# Allegro board PCB_ASSIGN2.brd
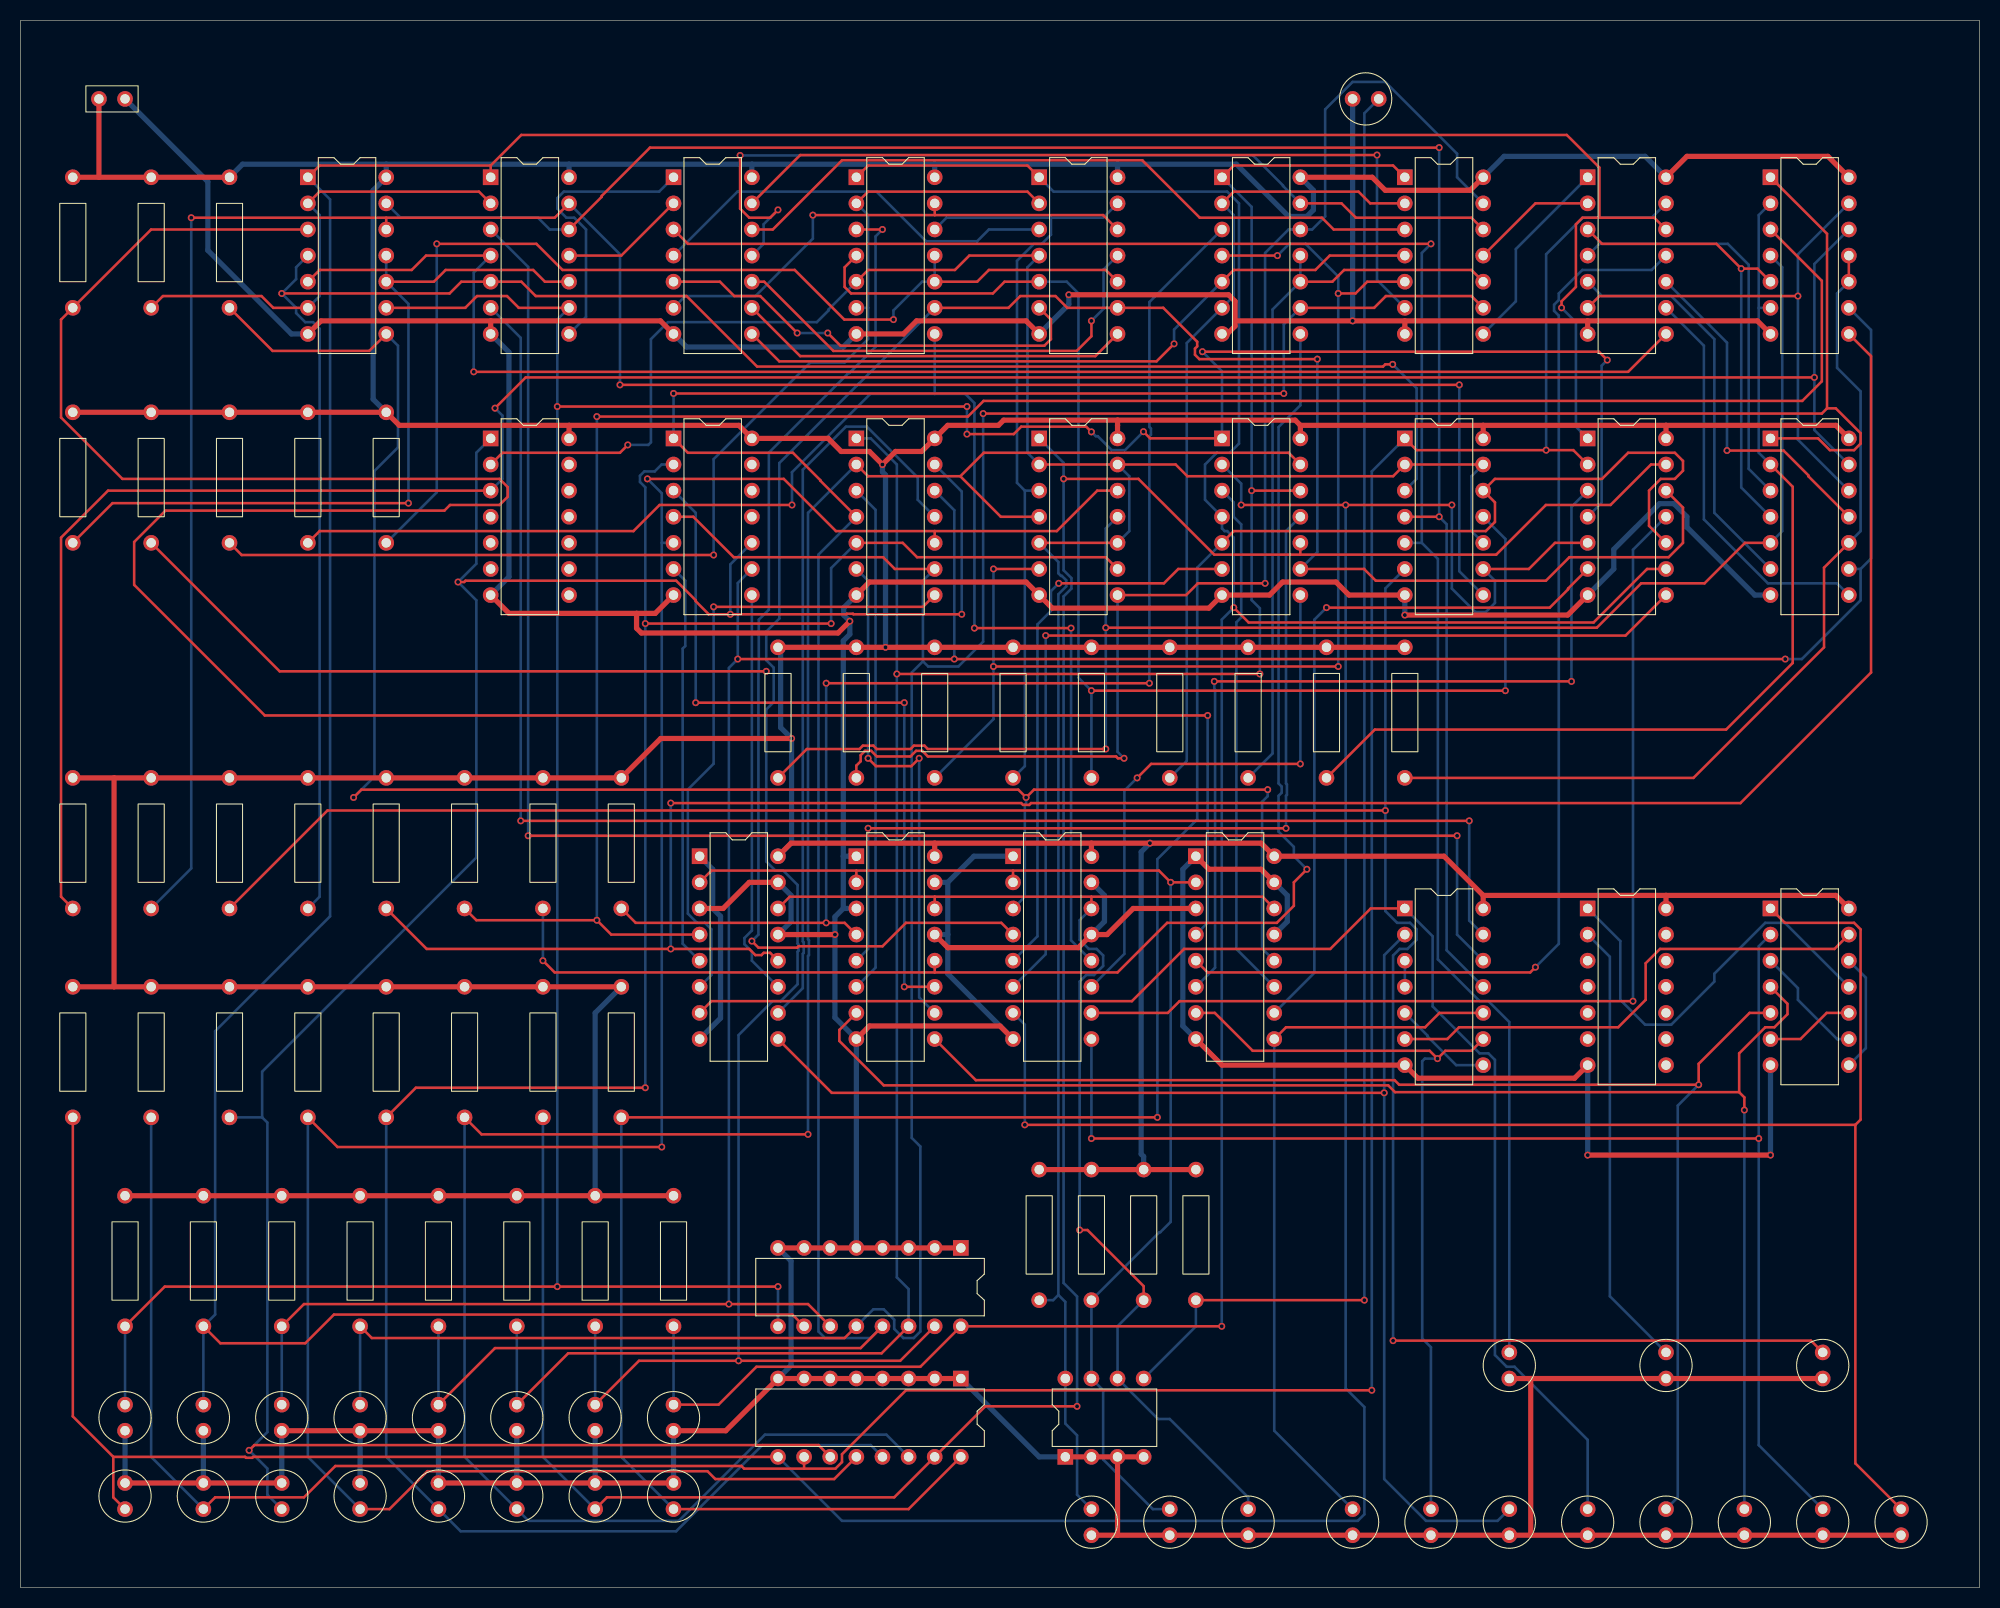
[diagram p0: board, top side]
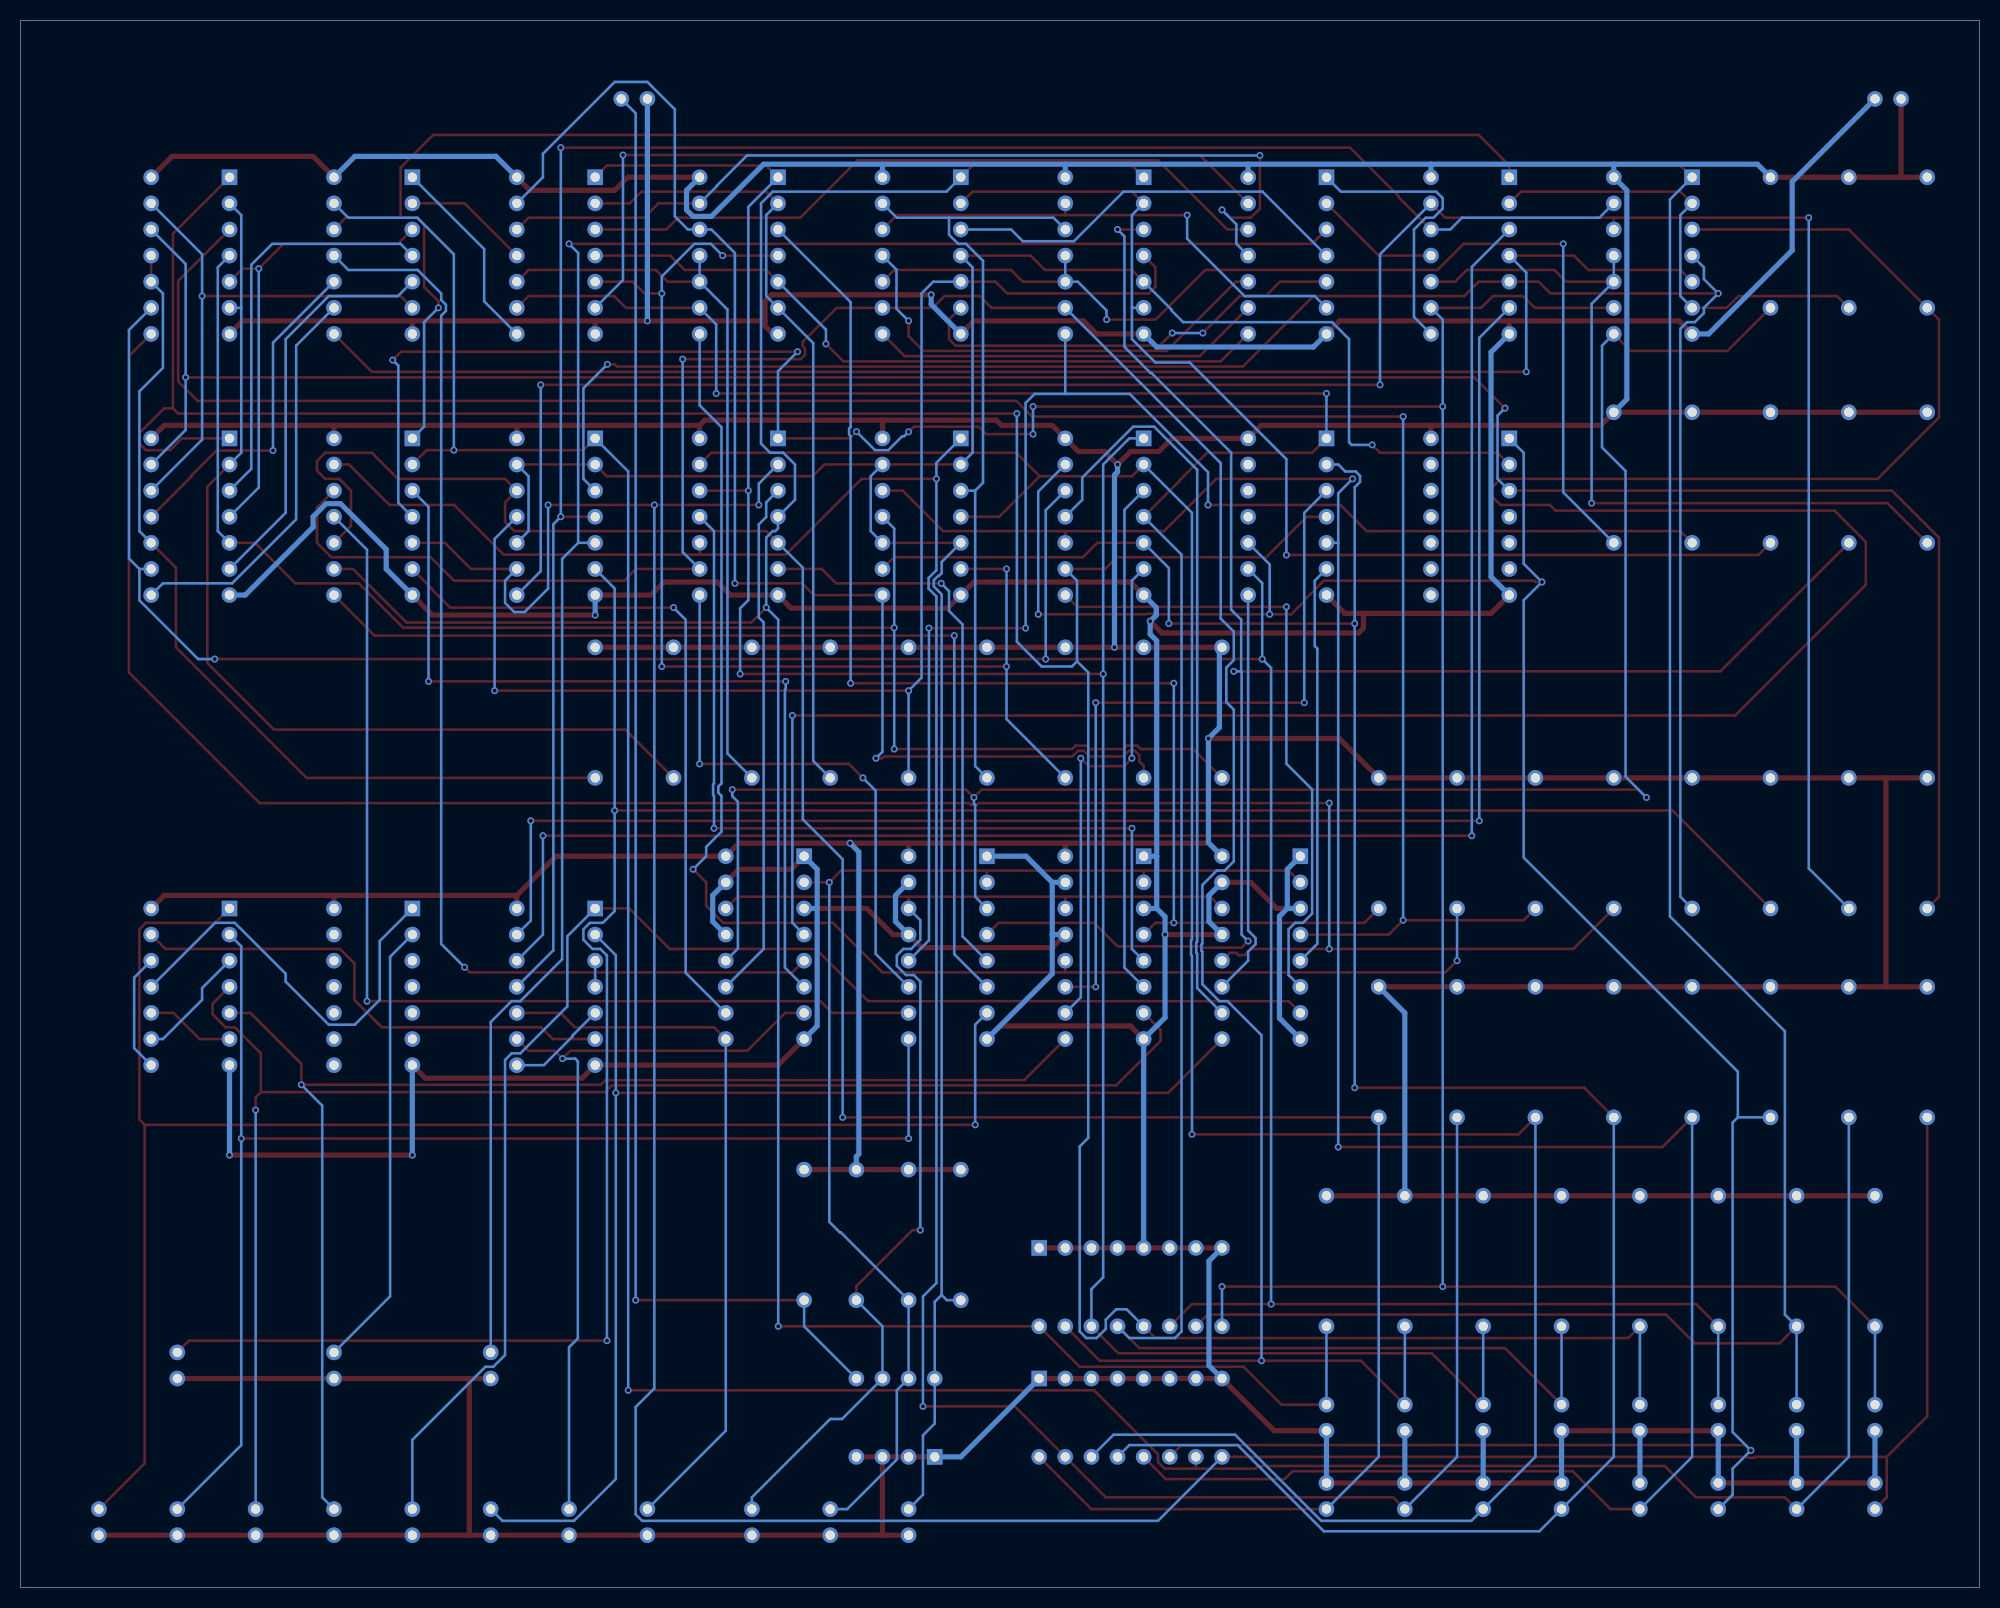
[diagram p1: board, bottom side, seen from below]

Outline 190.5 x 152.4 mm; copper layers: TOP, BOTTOM. Coordinates in mm from the lower left corner of the outline.
Outline path: 0,152.4 0,0 190.5,0 190.5,152.4 0,152.4

## Design rules (mm)
constraint set DEFAULT: min track width 0.254, pair gap 0.254
nets with their own width: min track width 0.508; nets GND VCC

## Placement (name value [footprint] x y rotation side)
D1  LED  [CAP196]  63.5 15.24 0 top
D2  LED  [CAP196]  55.88 15.24 0 top
D3  LED  [CAP196]  48.26 15.24 0 top
D4  LED  [CAP196]  40.64 15.24 0 top
D5  LED  [CAP196]  33.02 15.24 0 top
D6  LED  [CAP196]  25.4 15.24 0 top
D7  LED  [CAP196]  17.78 15.24 0 top
D8  LED  [CAP196]  10.16 15.24 0 top
D9  LED  [CAP196]  63.5 10.16 180 top
D10  LED  [CAP196]  55.88 10.16 180 top
D11  LED  [CAP196]  48.26 10.16 180 top
D12  LED  [CAP196]  40.64 10.16 180 top
D13  LED  [CAP196]  33.02 10.16 180 top
D14  LED  [CAP196]  25.4 10.16 180 top
D15  LED  [CAP196]  17.78 10.16 180 top
D16  LED  [CAP196]  10.16 10.16 180 top
D17  LED  [CAP196]  104.14 5.08 0 top
D18  LED  [CAP196]  111.76 5.08 0 top
D19  LED  [CAP196]  119.38 5.08 0 top
D20  LED  [CAP196]  182.88 5.08 0 top
D21  LED  [CAP196]  175.26 5.08 0 top
D22  LED  [CAP196]  167.64 5.08 0 top
D23  LED  [CAP196]  160.02 5.08 0 top
D24  LED  [CAP196]  152.4 5.08 0 top
D25  LED  [CAP196]  144.78 5.08 0 top
D26  LED  [CAP196]  137.16 5.08 0 top
D27  LED  [CAP196]  129.54 5.08 0 top
D28  LED  [CAP196]  129.54 144.78 270 top
D29  LED  [CAP196]  144.78 20.32 0 top
D30  LED  [CAP196]  160.02 20.32 0 top
D31  LED  [CAP196]  175.26 20.32 0 top
J1  HEADER 2  [JUMPER2]  7.62 144.78 0 top
R1  150  [RES500]  99.06 40.64 0 top
R2  150  [RES500]  104.14 40.64 0 top
R3  150  [RES500]  109.22 40.64 0 top
R4  150  [RES500]  114.3 40.64 0 top
R5  150  [RES500]  63.5 38.1 0 top
R6  150  [RES500]  55.88 38.1 0 top
R7  150  [RES500]  48.26 38.1 0 top
R8  150  [RES500]  40.64 38.1 0 top
R9  150  [RES500]  58.42 58.42 0 top
R10  150  [RES500]  33.02 38.1 0 top
R11  150  [RES500]  25.4 38.1 0 top
R12  150  [RES500]  50.8 58.42 0 top
R13  150  [RES500]  17.78 38.1 0 top
R14  150  [RES500]  43.18 58.42 0 top
R15  150  [RES500]  35.56 58.42 0 top
R16  150  [RES500]  10.16 38.1 0 top
R17  150  [RES500]  27.94 58.42 0 top
R18  150  [RES500]  20.32 58.42 0 top
R19  150  [RES500]  12.7 58.42 0 top
R20  150  [RES500]  5.08 58.42 0 top
R21  150  [RES500]  5.08 137.16 0 top
R22  150  [RES500]  12.7 137.16 0 top
R23  150  [RES500]  20.32 137.16 0 top
R24  150  [RES500]  5.08 114.3 0 top
R25  150  [RES500]  12.7 114.3 0 top
R26  150  [RES500]  20.32 114.3 0 top
R27  150  [RES500]  27.94 114.3 0 top
R28  150  [RES500]  35.56 114.3 0 top
R29  150  [RES500]  58.42 78.74 0 top
R30  150  [RES500]  111.76 91.44 0 top
R31  150  [RES500]  50.8 78.74 0 top
R32  150  [RES500]  119.38 91.44 0 top
R33  150  [RES500]  43.18 78.74 0 top
R34  150  [RES500]  127 91.44 0 top
R35  150  [RES500]  35.56 78.74 0 top
R36  150  [RES500]  134.62 91.44 0 top
R37  1K  [RES500]  27.94 78.74 0 top
R38  1K  [RES500]  20.32 78.74 0 top
R39  1K  [RES500]  12.7 78.74 0 top
R40  150  [RES500]  104.14 91.44 0 top
R41  150  [RES500]  96.52 91.44 0 top
R42  150  [RES500]  88.9 91.44 0 top
R43  150  [RES500]  81.28 91.44 0 top
R44  150  [RES500]  73.66 91.44 0 top
R45  150  [RES500]  5.08 78.74 0 top
SW1  SW DIP-4  [DIP8_3]  101.6 12.7 90 top
SW2  SW DIP-8  [DIP16_3]  91.44 33.02 270 top
SW3  SW DIP-8  [DIP16_3]  91.44 20.32 270 top
U1  7432  [DIP14_3]  170.18 66.04 0 top
U2  7404  [DIP14_3]  152.4 66.04 0 top
U3  7432  [DIP14_3]  134.62 66.04 0 top
U4  7486  [DIP14_3]  27.94 137.16 0 top
U5  7408  [DIP14_3]  45.72 137.16 0 top
U6  7432  [DIP14_3]  63.5 137.16 0 top
U7  7486  [DIP14_3]  81.28 137.16 0 top
U8  7408  [DIP14_3]  99.06 137.16 0 top
U9  7486  [DIP14_3]  116.84 137.16 0 top
U10  7408  [DIP14_3]  134.62 137.16 0 top
U11  7432  [DIP14_3]  152.4 137.16 0 top
U12  7486  [DIP14_3]  170.18 137.16 0 top
U13  7408  [DIP14_3]  170.18 111.76 0 top
U14  7408  [DIP14_3]  152.4 111.76 0 top
U15  74153  [DIP16_3]  114.3 71.12 0 top
U16  7486  [DIP14_3]  134.62 111.76 0 top
U17  7432  [DIP14_3]  116.84 111.76 0 top
U18  74153  [DIP16_3]  96.52 71.12 0 top
U19  7486  [DIP14_3]  99.06 111.76 0 top
U20  7408  [DIP14_3]  81.28 111.76 0 top
U21  74153  [DIP16_3]  81.28 71.12 0 top
U22  7432  [DIP14_3]  63.5 111.76 0 top
U23  74153  [DIP16_3]  66.04 71.12 0 top
U24  7486  [DIP14_3]  45.72 111.76 0 top

## Library data of the parts
D1-D31 = LED: Tolerance: ***; User Part Number: ***
J1 = HEADER 2: User Part Number: ***
R1-R36 R40-R45 = PULLUP_150: Tolerance: ***; User Part Number: ***
R37-R39 = PULLUP_1k: Tolerance: ***; User Part Number: ***
SW1 = SW DIP-4: Tolerance: ***; User Part Number: ***
SW2 SW3 = SW DIP-8: Tolerance: ***; User Part Number: ***
U1 U3 U6 U11 U17 U22 = 7432: Tolerance: ***; User Part Number: ***
U2 = 7404: Tolerance: ***; User Part Number: ***
U4 U7 U9 U12 U16 U19 U24 = 7486: Tolerance: ***; User Part Number: ***
U5 U8 U10 U13 U14 U20 = 7408: Tolerance: ***; User Part Number: ***
U15 U18 U21 U23 = 74153: Tolerance: ***; User Part Number: ***

## Footprints (pads in the part's own frame, mm; a bottom-side part is the same pattern mirrored in y, then rotated)
CAP196
  round 1.524 hole 0.914: 1(0,0) 2(0,2.54)
DIP8_3
  rect 1.524x1.524 hole 0.914: 1(0,0)
  round 1.524 hole 0.914: 2(0,-2.54) 3(0,-5.08) 4(0,-7.62) 5(7.62,-7.62) 6(7.62,-5.08) 7(7.62,-2.54) 8(7.62,0)
DIP14_3
  rect 1.524x1.524 hole 0.914: 1(0,0)
  round 1.524 hole 0.914: 2(0,-2.54) 3(0,-5.08) 4(0,-7.62) 5(0,-10.16) 6(0,-12.7) 7(0,-15.24) 8(7.62,-15.24) 9(7.62,-12.7) 10(7.62,-10.16) 11(7.62,-7.62) 12(7.62,-5.08) 13(7.62,-2.54) 14(7.62,0)
DIP16_3
  rect 1.524x1.524 hole 0.914: 1(0,0)
  round 1.524 hole 0.914: 2(0,-2.54) 3(0,-5.08) 4(0,-7.62) 5(0,-10.16) 6(0,-12.7) 7(0,-15.24) 8(0,-17.78) 9(7.62,-17.78) 10(7.62,-15.24) 11(7.62,-12.7) 12(7.62,-10.16) 13(7.62,-7.62) 14(7.62,-5.08) 15(7.62,-2.54) 16(7.62,0)
JUMPER2
  round 1.524 hole 0.914: 1(0,0) 2(2.54,0)
RES500
  round 1.524 hole 0.914: 1(0,-12.7) 2(0,0)

## Nets
GND: D1.1(CATHODE) D2.1(CATHODE) D3.1(CATHODE) D4.1(CATHODE) D5.1(CATHODE) D6.1(CATHODE) D7.1(CATHODE) D8.1(CATHODE) D9.1(CATHODE) D10.1(CATHODE) D11.1(CATHODE) D12.1(CATHODE) D13.1(CATHODE) D14.1(CATHODE) D15.1(CATHODE) D16.1(CATHODE) D17.1(CATHODE) D18.1(CATHODE) D19.1(CATHODE) D20.1(CATHODE) D21.1(CATHODE) D22.1(CATHODE) D23.1(CATHODE) D24.1(CATHODE) D25.1(CATHODE) D26.1(CATHODE) D27.1(CATHODE) D28.1(CATHODE) D29.1(CATHODE) D30.1(CATHODE) D31.1(CATHODE) J1.2 SW1.1 SW1.2 SW1.3 SW1.4 SW2.1 SW2.2 SW2.3 SW2.4 SW2.5 SW2.6 SW2.7 SW2.8 SW3.1 SW3.2 SW3.3 SW3.4 SW3.5 SW3.6 SW3.7 SW3.8 U1.7 U2.7 U3.7 U4.7 U5.7 U6.7 U7.7 U8.7 U9.7 U10.7 U11.7 U12.7 U13.7 U14.7 U15.1 U15.3 U15.8 U15.13 U15.15 U16.7 U17.7 U18.1 U18.8 U18.13 U18.15 U19.7 U20.7 U21.1 U21.3 U21.8 U21.13 U21.15 U22.7 U23.1 U23.3 U23.8 U23.13 U23.15 U24.7
VCC: J1.1 R1.2 R2.2 R3.2 R4.2 R5.2 R6.2 R7.2 R8.2 R9.2 R10.2 R11.2 R12.2 R13.2 R14.2 R15.2 R16.2 R17.2 R18.2 R19.2 R20.2 R21.2 R22.2 R23.2 R24.2 R25.2 R26.2 R27.2 R28.2 R29.2 R30.2 R31.2 R32.2 R33.2 R34.2 R35.2 R36.2 R37.2 R38.2 R39.2 R40.2 R41.2 R42.2 R43.2 R44.2 R45.2 U1.14 U2.14 U3.14 U4.14 U5.14 U6.14 U7.14 U8.14 U9.14 U10.14 U11.14 U12.14 U13.14 U14.14 U15.16 U16.14 U17.14 U18.16 U19.14 U20.14 U21.16 U22.14 U23.16 U24.14
A0: D1.2 R5.1 SW2.16 U7.1 U8.1 U14.9 U17.4
A1: D2.2 R6.1 SW2.15 U7.9 U8.9 U14.12 U17.9
A2: D3.2 R7.1 SW2.14 U9.1 U10.1 U17.12 U20.1
A3: D4.2 R8.1 SW2.13 U9.9 U10.9 U20.4 U22.1
A4: D5.2 R10.1 SW2.12 U12.1 U13.1 U20.9 U22.4
A5: D6.2 R11.1 SW2.11 U12.9 U13.9 U20.12 U22.9
A6: D7.2 R13.1 SW2.10 U4.1 U5.1 U11.12 U14.1
A7: D8.2 R16.1 SW2.9(B8) U4.9 U5.9 U14.4 U17.1
B0: D9.2 R9.1 SW3.16 U14.10 U16.12 U17.5
B1: D10.2 R12.1 SW3.15 U14.13 U17.10 U19.1
B2: D11.2 R14.1 SW3.14 U17.13 U19.4 U20.2
B3: D12.2 R15.1 SW3.13 U19.9 U20.5 U22.2
B4: D13.2 R17.1 SW3.12 U19.12 U20.10 U22.5
B5: D14.2 R18.1 SW3.11 U20.13 U22.10 U24.1
B6: D15.2 R19.1 SW3.10 U11.13 U14.2 U16.1
B7: D16.2 R20.1 SW3.9(B8) U14.5 U16.9 U17.2
CARRY: D29.2 U6.3 U16.5
CINTERNAL_BIBIT0: U6.6 U7.13 U8.12
CINTERNAL_BIBIT1: U6.11(Y) U9.13 U10.12
CINTERNAL_BIBIT2: U11.6 U12.13 U13.12
CINTERNAL_MSBIBIT: U3.11(Y) U4.13 U5.12 U16.4
DUMB: D28.2 R4.1 SW1.5(B4)
N00372_BIBIT0_FA0: R26.1 U7.2 U7.6 U8.2
N00372_BIBIT0_FA1: R28.1 U7.10 U7.11(Y) U8.10
N00372_BIBIT1_FA0: R30.1 U9.2 U9.6 U10.2
N00372_BIBIT1_FA1: R32.1 U9.10 U9.11(Y) U10.10
N00372_BIBIT2_FA0: R34.1 U12.2 U12.6 U13.2
N00372_BIBIT2_FA1: R36.1 U12.10 U12.11(Y) U13.10
N00372_MSBIBIT_FA: R22.1 U4.2 U4.6 U5.2
N00372_MSBIBIT_FA1: R24.1 U4.10 U4.11(Y) U5.10
N00431_BIBIT0_FA0: U6.4 U8.3
N00431_BIBIT0_FA1: U6.9 U8.8
N00431_BIBIT1_FA0: U6.12 U10.3
N00431_BIBIT1_FA1: U10.8 U11.1
N00431_BIBIT2_FA0: U11.4 U13.3
N00431_BIBIT2_FA1: U11.9 U13.8
N00431_MSBIBIT_FA: U3.12 U5.3
N00431_MSBIBIT_FA1: U5.8 U6.1
N00455_BIBIT0_FA0: U6.5 U8.6
N00455_BIBIT0_FA1: U6.10 U8.11(Y)
N00455_BIBIT1_FA0: U6.13 U10.6
N00455_BIBIT1_FA1: U10.11(Y) U11.2
N00455_BIBIT2_FA0: U11.5 U13.6
N00455_BIBIT2_FA1: U11.10 U13.11(Y)
N00455_MSBIBIT_FA: U3.13 U5.6
N00455_MSBIBIT_FA1: U5.11(Y) U6.2
N01397_BIBIT0: U14.8 U18.6
N01397_BIBIT1: U20.3 U21.6
N01397_BIBIT2: U20.8 U23.6
N01531_BIBIT0: U17.6 U18.5
N01531_BIBIT1: U17.11(Y) U21.5
N01531_BIBIT2: U22.6 U23.5
N01571_BIBIT0: R25.1 U7.3 U18.4
N01571_BIBIT1: R29.1 U9.3 U21.4
N01571_BIBIT2: R33.1 U12.3 U23.4
N01715_BIBIT0: R40.1 U7.4 U8.5 U16.11(Y)
N01715_BIBIT1: R42.1 U9.4 U10.5 U19.6
N01715_BIBIT2: R44.1 U12.4 U13.5 U19.11(Y)
N02695_BIBIT0: R41.1 U7.12 U8.13 U19.3
N02695_BIBIT1: R43.1 U9.12 U10.13 U19.8
N02695_BIBIT2: R45.1 U12.12 U13.13 U24.3
N03272_BIBIT0: U14.11(Y) U18.10
N03272_BIBIT1: U20.6 U21.10
N03272_BIBIT2: U20.11(Y) U23.10
N03290_BIBIT0: U17.8 U18.11
N03290_BIBIT1: U21.11 U22.3
N03290_BIBIT2: U22.8 U23.11
N03302_BIBIT0: R27.1 U7.8 U18.12
N03302_BIBIT1: R31.1 U9.8 U21.12
N03302_BIBIT2: R35.1 U12.8 U23.12
OP0: D19.2 R3.1 SW1.6 U15.14 U18.14 U21.14 U23.14
OP1: D18.2 R2.1 SW1.7 U15.2 U18.2 U21.2 U23.2
OP2: D17.2 R1.1 SW1.8 U7.5 U8.4 U16.2 U16.10 U16.13 U19.2 U19.5 U19.10 U19.13 U24.2
OUT0: D20.2 U1.1 U18.7
OUT1: D21.2 U1.2 U18.9(ZB)
OUT2: D22.2 U1.4 U21.7
OUT3: D23.2 U1.5 U21.9(ZB)
OUT4: D24.2 U3.1 U23.7
OUT5: D25.2 U3.2 U23.9(ZB)
OUT6: D26.2 U3.9 U15.7
OUT7: D27.2 U3.10 U15.9(ZB)
OVER: D31.2 R38.1 U16.6
SETLSB: R23.1 U4.8 U15.12 U18.3
ZERO: D30.2 U2.2
N00897: U6.8 U9.5 U10.4
N00909: U11.3 U12.5 U13.4
N00921: U4.5 U5.4 U11.8
N01659: U3.5 U3.8
N01663: U1.3 U1.9
N01667: U1.8 U1.12
N01671: U1.13 U3.6
N04025: U14.3 U15.6
N04155: U11.11(Y) U15.5
N04209: R21.1 U4.3 U15.4
N04265: U14.6 U15.10
N04287: U15.11 U17.3
N04351: R37.1 U4.4 U5.5 U16.3
N04563: R39.1 U4.12 U5.13 U16.8
N013601: U1.6 U1.10
N014012: U1.11(Y) U2.1
N014420: U3.3 U3.4

Pads without a net: U2 3 4 5 6 8 9 10 11 12 13; U22 11 12 13; U24 4 5 6 8 9 10 11 12 13

## Via types
v1: diameter 0.686, hole 0.381, TOP to BOTTOM, 143 vias

## Routing (per net, layer and track width the routed paths; a pad name or vN(x,y) marks a point on that pad's centre or on a via; arc(x,y) is an arc through that point)
GND: length 987.8
  TOP w0.508: v1(80.65,93.98) 79.5,92.83 60.37,92.83 59.91,93.3 59.91,94.74 ; v1(101.94,125.73) 117.48,125.73 118.11,125.09 118.11,123.19 ; 118.11,123.19 118.11,122.68 117.35,121.92 U9.7 ; 118.11,123.19 v1(129.54,123.19) 134.62,123.19 ; U2.7 151.13,49.53 135.89,49.53 U3.7 116.84,50.8 U15.8 ; 152.4,123.19 134.62,123.19 ; 152.4,123.19 168.91,123.19 U12.7 ; 152.4,123.19 U11.7 ; 134.62,123.19 U10.7 ; D9.1 D10.1 D11.1 D12.1 ; 59.91,94.74 61.72,94.74 U22.7 ; 59.91,94.74 47.5,94.74 U24.7 ; U20.7 82.55,97.79 97.79,97.79 U19.7 100.33,95.25 115.57,95.25 U17.7 121.46,96.52 122.73,97.79 127.92,97.79 129.19,96.52 U16.7 ; SW1.4 SW1.3 ; SW1.3 106.68,5.08 ; SW1.3 SW1.2 SW1.1 ; SW3.1 SW3.2 SW3.3 SW3.4 SW3.5 SW3.6 SW3.7 SW3.8 68.58,15.24 D1.1 ; v1(79.2,63.5) U23.13 ; D17.1 106.68,5.08 ; 106.68,5.08 D18.1 D19.1 D27.1 D26.1 D25.1 146.86,5.08 ; 45.72,123.19 62.23,123.19 U6.7 ; 45.72,123.19 29.21,123.19 U4.7 ; 45.72,123.19 U5.7 ; 146.86,5.08 D24.1 D23.1 D22.1 D21.1 D20.1 ; 146.86,5.08 146.86,20.32 ; D14.1 D15.1 D16.1 ; D29.1 146.86,20.32 ; 146.86,20.32 D30.1 D31.1 ; U21.8 82.55,54.61 95.25,54.61 U18.8 ; U14.7 150.46,94.58 v1(134.62,94.58) ; U15.15 120.65,69.85 115.57,69.85 U15.1 ; SW2.8 SW2.7 SW2.6 SW2.5 SW2.4 SW2.3 SW2.2 SW2.1 ; D6.1 D5.1 D4.1 ; U21.13 90.17,62.23 102.87,62.23 U18.13 105.66,63.5 108.2,66.04 U15.3 ; U7.7 85.86,121.92 87.13,123.19 97.79,123.19 U8.7 ; U23.15 70.87,68.58 68.33,66.04 U23.3 ; v1(170.18,42.05) v1(152.4,42.05)
  BOTTOM w0.508: U21.3 80.01,66.04 ; 80.01,66.04 79.2,65.23 v1(79.2,63.5) 79.2,55.42 U21.8 SW2.5 ; 80.01,66.04 80.01,71.12 ; U21.1 80.01,71.12 ; 80.01,71.12 80.01,92.07 80.65,92.71 v1(80.65,93.98) 80.05,94.57 80.05,95.29 U20.7 ; U8.7 101.94,124.8 v1(101.94,125.73) ; D8.1 D16.1 ; J1.2 18.21,136.73 18.21,130.05 26.34,121.92 U4.7 ; U23.13 74.93,64.77 74.93,67.31 U23.15 ; 113.03,66.04 113.03,54.61 U15.8 ; 113.03,66.04 113.03,69.85 U15.1 ; 113.03,66.04 U15.3 ; U21.15 90.17,68.58 ; 90.17,68.58 92.71,71.12 U18.1 ; 90.17,68.58 90.17,63.5 ; U18.15 105.41,67.31 105.41,64.77 U18.13 ; U18.8 90.17,59.69 90.17,63.5 ; U13.7 168.66,96.52 162.05,103.12 162.05,104.14 160.78,105.41 159.39,105.41 154.94,100.96 154.94,99.06 U14.7 ; SW3.1 99.06,12.7 SW1.1 ; U15.13 123.19,64.77 123.19,67.31 U15.15 ; SW3.8 74.93,21.59 74.93,31.75 SW2.8 ; D12.1 D4.1 ; 67.31,66.04 67.31,69.85 U23.1 ; 67.31,66.04 U23.3 ; 67.31,66.04 68.07,65.28 68.07,55.37 U23.8 ; D2.1 D10.1 ; U6.7 64.77,120.65 80.01,120.65 U7.7 ; D13.1 D5.1 ; U24.7 47.5,98.3 47.5,120.14 U5.7 ; 90.17,63.5 U21.13 ; D28.1 v1(129.54,123.19) ; D9.1 D1.1 ; D3.1 D11.1 ; D14.1 D6.1 ; U1.7 v1(170.18,42.05) ; v1(134.62,94.58) U16.7 ; v1(152.4,42.05) U2.7 ; D7.1 D15.1
VCC: length 887.1
  TOP w0.508: 160.02,113.03 176.53,113.03 U13.14 ; 160.02,113.03 142.24,113.03 ; 160.02,113.03 U14.14 ; R4.2 R3.2 R2.2 R1.2 ; U23.16 74.93,72.39 88.9,72.39 ; 142.24,113.03 U16.14 ; 142.24,113.03 124.46,113.03 ; R5.2 R6.2 R7.2 R8.2 R10.2 R11.2 R13.2 R16.2 ; R23.2 R22.2 7.62,137.16 ; 124.46,113.03 123.95,113.54 106.68,113.54 ; 124.46,113.03 U17.14 ; U12.14 175.77,139.19 162.05,139.19 U11.14 ; 53.34,113.03 69.85,113.03 U22.14 78.54,111.76 79.81,110.49 82.55,110.49 v1(83.82,109.22) 85.09,110.49 87.63,110.49 U20.14 90.17,113.03 95.1,113.03 95.61,113.54 106.68,113.54 ; 53.34,113.03 36.83,113.03 R28.2 R27.2 R26.2 R25.2 R24.2 ; 53.34,113.03 U24.14 ; U19.14 106.68,113.03 106.68,113.54 ; R20.2 9.09,58.42 ; 9.09,58.42 R19.2 R18.2 R17.2 R15.2 R14.2 R12.2 R9.2 ; 9.09,58.42 9.09,78.74 ; 142.24,67.31 138.43,71.12 U15.16 120.65,72.39 v1(109.83,72.39) 104.14,72.39 ; 142.24,67.31 U3.14 ; 142.24,67.31 160.02,67.31 ; R45.2 9.09,78.74 ; 9.09,78.74 R39.2 R38.2 R37.2 R35.2 R33.2 R31.2 R29.2 62.26,82.58 v1(74.98,82.58) ; U2.14 160.02,67.31 ; 160.02,67.31 176.53,67.31 U1.14 ; R44.2 R43.2 v1(84.12,91.44) R42.2 R41.2 R40.2 R30.2 R32.2 R34.2 R36.2 ; 7.62,137.16 J1.1 ; 7.62,137.16 R21.2 ; U18.16 104.14,72.39 ; 104.14,72.39 88.9,72.39 ; 88.9,72.39 U21.16 ; U10.14 140.97,135.89 132.72,135.89 131.45,137.16 U9.14
  BOTTOM w0.508: U9.14 125.73,135.89 125.73,133.99 125.1,133.35 123.32,133.35 118.24,138.43 106.68,138.43 ; 35.56,138.43 U4.14 34.29,135.89 34.29,115.57 R28.2 ; 35.56,138.43 21.59,138.43 R23.2 ; 35.56,138.43 53.34,138.43 ; U5.14 53.34,138.43 ; 53.34,138.43 71.12,138.43 ; v1(83.82,109.22) 83.82,108.5 84.12,108.2 v1(84.12,91.44) ; 88.9,138.43 106.68,138.43 ; 88.9,138.43 71.12,138.43 ; 88.9,138.43 U7.14 ; 106.68,138.43 U8.14 ; R6.2 55.88,55.88 R9.2 ; 71.12,138.43 U6.14 ; U10.14 144.27,139.19 157.99,139.19 U11.14 ; R3.2 109.22,41.91 108.98,42.15 108.98,71.54 v1(109.83,72.39) ; U23.16 74.98,72.44 v1(74.98,82.58) 73.91,83.64 73.91,91.19 R44.2
A0: length 261.2
  TOP w0.254: U7.1 82.42,138.3 97.92,138.3 U8.1 ; v1(116.81,25.4) SW2.16 87.5,21.46 71.56,21.46 67.88,17.78 D1.2 ; v1(117.98,95.3) 119.43,93.85 152.97,93.85 158.18,99.06 U14.9
  BOTTOM w0.254: R5.1 D1.2 ; v1(116.81,25.4) 116.81,94.13 v1(117.98,95.3) 117.98,102.11 117.35,102.74 117.09,102.74 116.84,103 U17.4 115.19,105.79 115.19,109.22 116.33,110.36 117.6,110.36 118.49,111.25 118.49,134.62 117.35,135.76 100.46,135.76 U8.1
A1: length 265.6
  TOP w0.254: U14.12 161.67,105.03 161.67,101.6 160.27,100.2 150.62,100.2 148.34,97.92 131.8,97.92 130.65,99.06 U17.9 ; SW2.15 85.55,22.05 v1(69.82,22.05) 60.15,22.05 D2.2 ; U7.9 96.08,124.46 97.22,125.6 100.65,125.6 101.79,124.46 U8.9 111.12,124.46 114.43,121.16 114.43,120.71 114.21,120.49 114.21,119.89 114.64,119.47 v1(126.11,119.47)
  BOTTOM w0.254: v1(126.11,119.47) 126.11,100.71 U17.9 ; R6.1 D2.2 ; v1(69.82,22.05) 69.82,53.72 73.13,57.02 73.91,57.02 75.56,58.67 75.56,61.84 75.65,61.93 75.65,62.53 75.56,62.62 75.56,68.33 74.17,69.72 73.41,69.72 72.52,70.61 72.52,85.39 73.24,86.11 73.24,89.47 72.52,90.19 72.52,92.96 73.79,94.23 73.79,109.36 81.53,117.11 81.55,117.11 U7.9
A2: length 246.8
  TOP w0.254: D3.2 53.25,22.77 83.73,22.77 SW2.14 ; U17.12 v1(119.72,106.68) ; U10.1 133.48,138.3 117.98,138.3 U9.1 ; v1(120.52,88.85) v1(85.22,88.85)
  BOTTOM w0.254: R7.1 D3.2 ; SW2.14 86.36,29.02 85.22,30.16 v1(85.22,88.85) 85.22,109.22 82.68,111.76 U20.1 ; U9.1 119.72,134.28 v1(119.72,106.68) 119.72,96.03 120.52,95.23 v1(120.52,88.85)
A3: length 254.1
  TOP w0.254: U9.9 131.64,124.46 132.78,125.6 141.1,125.6 U10.9 ; D4.2 46.14,23.28 81.7,23.28 SW2.13 ; U20.4 77.77,107.65 77.77,107.7 75.11,110.36 64.9,110.36 U22.1 ; v1(122.85,116.13) v1(63.5,116.13)
  BOTTOM w0.254: v1(122.85,116.13) 122.85,122.85 U9.9 ; SW2.13 82.68,24.26 78.23,24.26 77.6,24.89 77.6,100.46 U20.4 ; R8.1 D4.2 ; v1(63.5,116.13) U22.1
A4: length 319.7
  TOP w0.254: U22.4 65.42,104.14 69.35,100.2 83.88,100.2 85.03,99.06 U20.9 ; SW2.12 80.14,24.26 34.16,24.26 R10.1 ; U12.1 175.68,131.66 175.68,114.68 ; 175.68,114.68 175.17,114.17 v1(93.61,114.17) ; 175.68,114.68 176.53,114.68 178.94,112.27 178.94,111.25 178.31,110.62 175.96,110.62 174.82,111.76 U13.1
  BOTTOM w0.254: U20.9 87.76,97.92 87.76,90.08 ; D5.2 R10.1 ; 87.76,90.08 86.66,88.99 86.66,43.73 87.5,42.89 87.5,24.89 86.87,24.26 85.85,24.26 84.96,25.15 84.96,26.03 83.95,27.05 82.93,27.05 SW2.12 ; 87.76,90.08 88.27,89.57 91.2,89.57 93.61,91.99 v1(93.61,114.17)
A5: length 294.8
  TOP w0.254: R11.1 27.56,27.56 v1(68.88,27.56) 76.58,27.56 SW2.11 ; v1(69.75,90.3) v1(90.81,90.3) v1(171.62,90.3)
  BOTTOM w0.254: v1(171.62,90.3) 173.23,90.3 178.94,96.01 178.94,99.06 ; 178.94,99.06 179.96,100.08 179.96,122.3 U12.9 ; 178.94,99.06 U13.9 ; U20.12 90.81,104.77 v1(90.81,90.3) ; D6.2 R11.1 ; v1(68.88,27.56) 68.88,89.43 v1(69.75,90.3) 69.75,97.69 U22.9
A6: length 352.7
  TOP w0.254: 45.72,138.3 29.08,138.3 U4.1 ; 45.72,138.3 48.69,141.27 150.37,141.27 153.54,138.1 153.54,133.22 ; 45.72,138.3 U5.1 ; 153.54,133.22 151.89,133.22 151.26,132.59 151.26,126.49 149.86,125.09 v1(149.86,124.46) ; 153.54,133.22 158.88,133.22 U11.12 ; R13.1 19.43,23.75 27.69,23.75 30.48,26.54 75.06,26.54 SW2.10
  BOTTOM w0.254: U14.1 151.26,112.9 151.26,123.06 v1(149.86,124.46) ; D7.2 R13.1 18.92,26.54 18.92,54.1 30.1,65.28 30.1,135 U4.1
A7: length 325.5
  TOP w0.254: v1(92.04,112.18) 96.59,112.18 97.31,112.9 103.63,112.9 v1(104.14,112.39) ; U5.9 48.45,124.46 47.31,125.6 44.39,125.6 43.24,124.46 U4.9 ; v1(109.2,112.41) 109.86,111.76 U17.1 ; v1(154.31,119.38) 153.49,120.19 v1(114.94,120.19) ; v1(92.04,114.86) v1(52.2,114.86) ; R16.1 14.02,29.26 v1(52.2,29.26) v1(73.66,29.26)
  BOTTOM w0.254: U14.4 153.76,105.5 153.76,118.83 v1(154.31,119.38) ; U17.1 116.84,118.29 v1(114.94,120.19) ; v1(104.14,112.39) 104.56,111.97 104.76,111.97 106.11,110.62 107.4,110.62 v1(109.2,112.41) ; U5.9 52.2,123.32 v1(52.2,114.86) v1(52.2,29.26) ; v1(92.04,114.86) v1(92.04,112.18) ; D8.2 R16.1 ; SW2.9 v1(73.66,29.26)
B0: length 243.9
  TOP w0.254: U14.10 158.37,103.25 158.37,106.68 159.51,107.82 160.88,107.82 161.67,108.62 161.67,109.57 160.88,110.36 156.34,110.36 153.8,107.82 143.38,107.82 U16.12 143.38,105.54 143.38,103.63 142.49,102.74 117.98,102.74 U17.5 ; v1(110.55,45.72) R9.1 ; D9.2 86.36,7.62 SW3.16
  BOTTOM w0.254: D9.2 58.42,12.7 R9.1 ; v1(110.55,45.72) 110.55,70.83 114.43,74.71 114.43,99.19 U17.5
B1: length 253.9
  TOP w0.254: D10.2 57.02,8.76 84.96,8.76 SW3.15 93.81,17.61 v1(102.74,17.61) ; 124.46,100.46 143.51,100.46 148.34,105.28 154.62,105.28 158.56,109.22 U14.13 ; 124.46,100.46 U17.10 ; 124.46,100.46 116.08,100.46 108.71,107.82 v1(101.43,107.82)
  BOTTOM w0.254: U19.1 101.43,109.39 v1(101.43,107.82) 101.43,98.94 102.2,98.17 102.2,97.15 101.43,96.39 101.43,29.61 102.74,28.3 v1(102.74,17.61) ; D10.2 50.8,12.7 R12.1
B2: length 238.8
  TOP w0.254: v1(76.58,44.07) 44.83,44.07 R14.1 ; 91.39,108.08 82.42,108.08 U20.2 ; 91.39,108.08 95.33,104.14 U19.4 ; 91.39,108.08 93.68,110.36 123.32,110.36 U17.13
  BOTTOM w0.254: U20.2 76.58,104.52 76.58,63.04 76.67,62.95 76.67,61.51 76.58,61.42 v1(76.58,44.07) ; R14.1 43.18,12.7 D11.2 49.4,6.48 64.01,6.48 72.39,14.86 84.2,14.86 SW3.14
B3: length 231.5
  TOP w0.254: U20.5 85.79,101.6 87.19,100.2 105.54,100.2 U19.9 ; v1(78.83,93.75) v1(60.76,93.75) ; v1(60.76,48.6) 38.44,48.6 R15.1
  BOTTOM w0.254: SW3.13 82.68,13.84 72.14,13.84 63.75,5.46 42.8,5.46 D12.2 35.56,12.7 R15.1 ; U22.2 62.34,109.22 61.67,108.55 60.66,108.55 60.24,108.12 60.24,107.52 60.76,107 v1(60.76,93.75) v1(60.76,48.6) ; U20.5 78.83,99.15 v1(78.83,93.75)
B4: length 244.1
  TOP w0.254: 88.9,102.74 100.77,102.74 104.71,106.68 U19.12 ; 88.9,102.74 U20.10 ; 88.9,102.74 79.3,102.74 74.22,107.82 v1(60.96,107.82) ; v1(62.36,42.84) 30.82,42.84 R17.1 ; D13.2 35.88,7.62 39.56,11.3 66.8,11.3 67.56,10.54 79.12,10.54 SW3.12
  BOTTOM w0.254: D13.2 27.94,12.7 R17.1 ; U22.5 62.36,101.6 ; 62.36,101.6 62.36,106.43 v1(60.96,107.82) ; 62.36,101.6 v1(62.36,42.84)
B5: length 251.4
  TOP w0.254: v1(42.55,97.79) 43.14,97.79 43.27,97.92 63.75,97.92 65.66,96.01 65.66,95.92 66.93,94.65 v1(69.02,94.65) 80.29,94.65 80.35,94.7 80.94,94.7 81,94.65 v1(91.53,94.65) ; v1(22.23,13.33) 22.73,13.84 77.6,13.84 SW3.11
  BOTTOM w0.254: 23.5,45.72 24,45.21 24,15.11 v1(22.23,13.33) 24,11.56 24,9.02 D14.2 ; 23.5,45.72 23.5,50.16 44.32,70.99 44.32,96.01 v1(42.55,97.79) 44.32,99.57 44.32,110.36 U24.1 ; 23.5,45.72 R18.1 ; v1(91.53,94.65) 91.53,106.59 U20.13 ; v1(69.02,94.65) 69.02,99.5 U22.10
B6: length 305.9
  TOP w0.254: SW3.10 76.2,11.56 ; 76.2,11.56 79.25,11.56 79.88,12.19 79.88,12.95 86.11,19.18 v1(131.41,19.18) ; 76.2,11.56 70.36,11.56 70.1,11.81 30.61,11.81 27.56,8.76 18.92,8.76 D15.2 ; U16.1 135.76,110.62 v1(148.36,110.62) 151,110.62 U14.2
  BOTTOM w0.254: v1(131.41,19.18) 131.41,108.55 U16.1 ; D15.2 12.7,12.7 R19.1 ; U11.13 158.62,133.22 151.92,133.22 148.36,129.67 v1(148.36,110.62)
B7: length 317.5
  TOP w0.254: R20.1 5.08,16.64 9.02,12.7 ; U16.9 146.69,99.06 149.23,101.6 U14.5 ; 9.02,12.7 21.84,12.7 21.93,12.61 22.52,12.61 22.61,12.7 SW3.9 ; 9.02,12.7 9.02,8.76 D16.2 ; v1(118.71,105.28) v1(128.87,105.28) v1(139.19,105.28)
  BOTTOM w0.254: v1(118.71,105.28) 118.71,107.35 U17.2 ; SW3.9 79.88,6.48 130.05,6.48 130.68,7.11 130.68,17.54 128.87,19.36 v1(128.87,105.28) ; v1(139.19,105.28) 139.19,97.15 141.48,94.87 142.49,94.87 143.38,95.76 143.38,97.92 U16.9
CARRY: length 188.1
  TOP w0.254: v1(137.16,130.68) 64.9,130.68 U6.3
  BOTTOM w0.254: U16.5 136.27,101.6 ; 136.27,101.6 136.27,129.79 v1(137.16,130.68) ; 136.27,101.6 137.83,100.04 137.83,61.09 141.9,57.02 142.75,57.02 144.78,54.99 D29.2
CINTERNAL_BIBIT0: length 50
  TOP w0.254: U8.12 105.28,133.48 88.9,133.48 ; 88.9,133.48 v1(77.05,133.48) ; 88.9,133.48 U7.13
  BOTTOM w0.254: v1(77.05,133.48) 77.05,131.19 71.46,125.6 64.64,125.6 U6.6
CINTERNAL_BIBIT1: length 90.3
  TOP w0.254: U10.12 141.1,133.22 129.86,133.22 128.46,134.62 U9.13 ; v1(69.98,139.28) 69.98,134.11 70.87,133.22 72.9,133.22 v1(73.66,133.99)
  BOTTOM w0.254: v1(73.66,133.99) 72.26,132.59 72.26,130.68 U6.11 ; U9.13 122.77,136.31 122.77,136.36 119.85,139.28 v1(69.98,139.28)
CINTERNAL_BIBIT2: length 53
  TOP w0.254: v1(172.85,125.6) 153.54,125.6 U11.6
  BOTTOM w0.254: U12.13 172.85,129.67 v1(172.85,125.6) 172.85,111.63 U13.12
CINTERNAL_MSBIBIT: length 193.5
  TOP w0.254: v1(137.96,140.04) 61.21,140.04 56.52,135.34 56.52,135.25 U5.12 ; U16.4 v1(137.96,104.14)
  BOTTOM w0.254: v1(137.96,140.04) v1(137.96,104.14) 138.68,103.42 138.68,61.98 U3.11 ; U4.13 36.96,133.22 50.32,133.22 51.46,132.08 U5.12
DUMB: length 143.5
  TOP w0.254: v1(130.68,27.94) R4.1
  BOTTOM w0.254: R4.1 114.3,25.4 SW1.5 ; D28.2 130.68,143.38 v1(130.68,27.94)
N00372_BIBIT0_FA0: length 110.3
  TOP w0.254: v1(67.4,100.42) 21.5,100.42 R26.1 ; U7.2 82.42,135.76 97.92,135.76 U8.2
  BOTTOM w0.254: v1(67.4,100.42) 67.4,109.74 76.8,119.14 80.14,119.14 82.42,121.42 82.42,124.46 ; U7.6 82.42,124.46 ; 82.42,124.46 82.42,133.48 U7.2
N00372_BIBIT0_FA1: length 105.9
  TOP w0.254: U8.10 105.54,128.14 94.17,128.14 93.03,127 U7.10 ; v1(40.47,130.68) 50.17,130.68 52.71,128.14 75.29,128.14 80.11,123.32 v1(84.89,123.32)
  BOTTOM w0.254: v1(84.89,123.32) 84.89,124.21 87.68,127 U7.10 U7.11 ; R28.1 40.47,106.51 v1(40.47,130.68)
N00372_BIBIT1_FA0: length 77.7
  TOP w0.254: U10.2 131.25,134.62 130.11,135.76 117.98,135.76 U9.2
  BOTTOM w0.254: U9.2 117.98,133.48 117.98,125.6 U9.6 113.41,121.03 113.41,80.39 R30.1
N00372_BIBIT1_FA1: length 71.6
  TOP w0.254: U10.10 141.1,128.14 128.71,128.14 127.57,127 U9.10
  BOTTOM w0.254: R32.1 121.75,81.11 121.75,124.29 U9.10 U9.11
N00372_BIBIT2_FA0: length 97.7
  TOP w0.254: R34.1 131.7,83.44 165.86,83.44 172.34,89.92 172.34,107.06 U13.2
  BOTTOM w0.254: U12.6 169.04,124.46 ; 169.04,124.46 169.04,110.36 U13.2 ; 169.04,124.46 169.04,133.48 U12.2
N00372_BIBIT2_FA1: length 87
  TOP w0.254: U13.10 175.39,99.19 175.39,91.44 162.69,78.74 R36.1 ; U12.11 U12.10
  BOTTOM w0.254: U13.10 178.94,102.74 178.94,116.33 176.66,118.62 176.66,125.86 U12.10
N00372_MSBIBIT_FA: length 46
  TOP w0.254: U5.2 44.58,135.76 29.08,135.76 U4.2 ; U4.6 24.57,124.46 23.43,125.6 13.84,125.6 R22.1
  BOTTOM w0.254: U4.6 29.08,125.6 29.08,133.48 U4.2
N00372_MSBIBIT_FA1: length 77.9
  TOP w0.254: U5.10 50.99,127 49.85,128.14 41.34,128.14 40.2,127 U4.10 ; v1(37.72,105.46) 8.94,105.46 R24.1
  BOTTOM w0.254: v1(37.72,105.46) 37.72,124.84 U4.10 U4.11
N00431_BIBIT0_FA0: length 40.6
  BOTTOM w0.254: U6.4 69.72,135.76 83.24,135.76 88.06,130.94 93.03,130.94 94.17,132.08 U8.3
N00431_BIBIT0_FA1: length 38.4
  TOP w0.254: U8.8 104.52,119.76 75.82,119.76 U6.9
N00431_BIBIT1_FA0: length 69.1
  TOP w0.254: U10.3 127.7,132.08 126.56,133.22 114.68,133.22 109.09,138.81 79.88,138.81 73.15,132.08 U6.12
N00431_BIBIT1_FA1: length 19.4
  BOTTOM w0.254: U10.8 145.42,125.09 145.42,130.18 U11.1
N00431_BIBIT2_FA0: length 39.8
  BOTTOM w0.254: U13.3 168.06,108.8 168.06,128.65 166.03,130.68 153.54,130.68 U11.4
N00431_BIBIT2_FA1: length 39.2
  BOTTOM w0.254: U13.8 176.66,97.66 169.93,97.66 163.7,103.89 163.7,120.78 U11.9
N00431_MSBIBIT_FA: length 164
  TOP w0.254: v1(139.7,73.11) v1(49.36,73.11)
  BOTTOM w0.254: U3.12 139.7,63.5 v1(139.7,73.11) ; U5.3 49.36,128.44 v1(49.36,73.11)
N00431_MSBIBIT_FA1: length 27.6
  BOTTOM w0.254: U6.1 62.1,135.76 52.83,135.76 52.2,135.13 52.2,134.11 53.09,133.22 53.85,133.22 54.99,132.08 54.99,123.57 U5.8
N00455_BIBIT0_FA0: length 43.1
  TOP w0.254: v1(78.5,122.01) 79.73,120.78 99.57,120.78 100.2,121.41 100.2,123.32 U8.6 ; v1(75.53,122.01) 71.93,125.6 69.41,125.6 68.01,127 U6.5
  BOTTOM w0.254: v1(75.53,122.01) v1(78.5,122.01)
N00455_BIBIT0_FA1: length 45.3
  TOP w0.254: U6.10 72.31,127 79.04,120.27 102.71,120.27 104.14,121.7 v1(104.14,123.19)
  BOTTOM w0.254: v1(104.14,123.19) 105.32,124.37 105.32,128.18 U8.11
N00455_BIBIT1_FA0: length 78.7
  TOP w0.254: U6.13 75.82,139.32 v1(131.91,139.32)
  BOTTOM w0.254: v1(131.91,139.32) 131.91,127.17 U10.6
N00455_BIBIT1_FA1: length 12.3
  TOP w0.254: U11.2 147.32,134.62 U10.11
N00455_BIBIT2_FA0: length 39.2
  BOTTOM w0.254: U13.6 164.72,104.52 164.72,121.41 160.53,125.6 153.8,125.6 U11.5
N00455_BIBIT2_FA1: length 33.4
  TOP w0.254: v1(165.95,110.58) 171.45,110.58 173.86,108.17 173.86,108.08 U13.11
  BOTTOM w0.254: U11.10 165.95,121.07 v1(165.95,110.58)
N00455_MSBIBIT_FA: length 155
  TOP w0.254: v1(48.64,74.56) v1(140.88,74.56)
  BOTTOM w0.254: v1(48.64,74.56) 48.64,121.54 U5.6 ; U3.13 140.88,64.86 v1(140.88,74.56)
N00455_MSBIBIT_FA1: length 12.3
  TOP w0.254: U6.2 58.42,129.54 U5.11
N01397_BIBIT0: length 97.4
  TOP w0.254: v1(99.7,92.58) 156.08,92.58 U14.8
  BOTTOM w0.254: v1(99.7,92.58) 99.7,61.6 U18.6
N01397_BIBIT1: length 49.8
  BOTTOM w0.254: U20.3 83.15,104.81 83.15,60.29 U21.6
N01397_BIBIT2: length 61.8
  TOP w0.254: U20.8 87.76,95.38 v1(67.4,95.38)
  BOTTOM w0.254: v1(67.4,95.38) 67.4,80.12 64.9,77.62 64.9,65.53 65.79,64.64 66.55,64.64 67.18,64.01 67.18,59.56 U23.6
N01531_BIBIT0: length 55
  TOP w0.254: U17.6 112.59,99.06 111.19,97.66 v1(100.97,97.66)
  BOTTOM w0.254: U18.5 98.89,63.33 98.89,93.67 100.2,94.98 100.2,96.9 v1(100.97,97.66)
N01531_BIBIT1: length 84.9
  TOP w0.254: v1(82.42,73.84) v1(123.06,73.84)
  BOTTOM w0.254: U17.11 123.06,102.74 123.06,78.2 123.15,78.11 123.15,77.09 123.06,77 v1(123.06,73.84) ; v1(82.42,73.84) 82.42,62.1 U21.5
N01531_BIBIT2: length 39.4
  BOTTOM w0.254: U22.6 64.64,97.92 64.64,91.57 64.39,91.31 64.39,62.61 U23.5
N01571_BIBIT0: length 169.9
  TOP w0.254: R25.1 25.2,89.1 v1(72.52,89.1) ; U18.4 95.38,64.64 86.11,64.64 83.82,62.36 75.65,62.36 75.53,62.23 71.76,62.23 v1(71.12,62.86) ; U7.3 v1(83.82,132.08)
  BOTTOM w0.254: v1(72.52,89.1) 71.79,89.1 ; 71.79,89.1 71.79,94.13 72.77,95.1 72.77,110.38 80.52,118.12 80.61,118.12 83.15,120.66 83.15,131.41 v1(83.82,132.08) ; 71.79,89.1 71.76,89.07 71.76,63.5 v1(71.12,62.86)
N01571_BIBIT1: length 125.8
  TOP w0.254: v1(109.78,87.95) v1(78.35,87.95) ; U21.4 80.14,64.64 v1(78.35,64.64) 59.82,64.64 R29.1
  BOTTOM w0.254: U9.3 109.78,125.02 109.78,112.86 109.92,112.71 109.92,112.11 109.78,111.97 v1(109.78,87.95) ; v1(78.35,87.95) v1(78.35,64.64)
N01571_BIBIT2: length 210.3
  TOP w0.254: R33.1 44.32,64.9 v1(56.05,64.9) 57.44,63.5 U23.4 ; v1(56.05,113.88) 92.13,113.88 93.65,115.4 173.27,115.4 175.17,117.31 175.17,127.09 U12.3
  BOTTOM w0.254: v1(56.05,113.88) v1(56.05,64.9)
N01715_BIBIT0: length 133.2
  TOP w0.254: U8.5 95.69,127 94.55,125.86 80.77,125.86 80.14,126.49 80.14,128.4 U7.4 ; v1(144.4,87.22) v1(104.14,87.22)
  BOTTOM w0.254: U16.11 144.4,101.98 v1(144.4,87.22) ; R40.1 v1(104.14,87.22) 102.88,88.48 102.88,125.86 101.74,127 U8.5
N01715_BIBIT1: length 118.6
  TOP w0.254: v1(128.14,125.86) 129.82,125.86 130.96,127 U10.5 ; U9.4 v1(122.23,129.54) ; U19.6 v1(94.62,99.06) ; v1(128.14,89.57) v1(94.62,89.57)
  BOTTOM w0.254: v1(122.23,129.54) 123.37,130.68 124.97,130.68 128.14,127.51 v1(128.14,125.86) v1(128.14,89.57) ; v1(94.62,99.06) v1(94.62,89.57) 94.62,84.46 R42.1
N01715_BIBIT2: length 153.6
  TOP w0.254: v1(105.54,81.55) 88.23,81.55 87.9,81.88 86.88,81.88 86.55,81.55 83.26,81.55 82.93,81.88 81.91,81.88 81.58,81.55 76.47,81.55 R44.1 ; U13.5 167.7,101.6 163.77,97.66 157.61,97.66 153.29,93.34 v1(105.54,93.34)
  BOTTOM w0.254: U19.11 105.54,103 v1(105.54,93.34) v1(105.54,81.55) ; U12.4 171.32,128.4 171.32,102.74 U13.5
N02695_BIBIT0: length 77.3
  BOTTOM w0.254: 100.2,133.22 100.2,131.57 99.31,130.68 98.55,130.68 96.9,129.03 96.9,107.44 97.66,106.68 ; 100.2,133.22 90.04,133.22 U7.12 ; 100.2,133.22 105.28,133.22 U8.13 ; 97.66,106.68 97.66,79.88 R41.1 ; 97.66,106.68 U19.3
N02695_BIBIT1: length 132.4
  TOP w0.254: U19.8 113.35,96.52 114.49,97.66 v1(121.03,97.66) ; R43.1 81.28,79.93 81.7,80.35 81.7,80.94 82.12,81.37 82.72,81.37 83.27,80.82 86.54,80.82 87.09,81.37 87.69,81.37 88.23,80.82 106.54,80.82 106.72,80.64 v1(107.31,80.64)
  BOTTOM w0.254: U10.13 139.7,137.16 139.7,139.45 132.72,146.43 129.54,146.43 126.87,143.76 126.87,133.35 125.6,132.08 U9.12 123.32,132.08 121.03,129.79 v1(121.03,97.66) ; v1(107.31,80.64) 106.68,81.28 U19.8
N02695_BIBIT2: length 244.2
  TOP w0.254: U24.3 8.51,106.68 3.94,102.11 3.94,67.18 R45.1 ; v1(46.14,114.7) 49.13,117.69 v1(174.45,117.69)
  BOTTOM w0.254: U24.3 46.86,107.82 46.86,113.98 v1(46.14,114.7) ; U12.12 174.45,128.73 v1(174.45,117.69) 174.45,112.57 U13.13
N03272_BIBIT0: length 101.6
  TOP w0.254: v1(156.81,57.02) 112.71,57.02 111.57,55.88 U18.10
  BOTTOM w0.254: v1(156.81,57.02) 156.81,100.93 U14.11
N03272_BIBIT1: length 49.9
  TOP w0.254: v1(87.39,80.64) 86.63,79.88 83.19,79.88 v1(82.42,80.64)
  BOTTOM w0.254: U20.6 82.42,97.92 v1(82.42,80.64) ; v1(87.39,80.64) 87.39,57.39 U21.10
N03272_BIBIT2: length 73.4
  BOTTOM w0.254: U23.10 76.07,58.29 76.07,61.63 76.16,61.72 76.16,62.74 76.07,62.83 76.07,108.71 80.26,112.9 82.3,112.9 87.25,107.95 87.25,105.79 U20.11
N03290_BIBIT0: length 55
  TOP w0.254: v1(108.59,78.74) 109.94,80.1 v1(124.46,80.1)
  BOTTOM w0.254: U18.11 107.34,61.62 107.34,77.5 v1(108.59,78.74) ; U17.8 v1(124.46,80.1)
N03290_BIBIT1: length 72.4
  TOP w0.254: U21.11 v1(85.94,58.42) ; v1(85.94,86.06) v1(65.66,86.06)
  BOTTOM w0.254: v1(85.94,58.42) v1(85.94,86.06) ; U22.3 65.66,104.52 v1(65.66,86.06)
N03290_BIBIT2: length 39.8
  BOTTOM w0.254: U23.11 71.12,60.96 71.12,61.84 70.4,62.57 70.4,63.16 71.12,63.89 U22.8
N03302_BIBIT0: length 143.3
  TOP w0.254: R27.1 29.08,102.74 59.6,102.74 62.14,105.28 v1(75.02,105.28) ; v1(102.16,93.31) v1(92.76,93.31)
  BOTTOM w0.254: v1(92.76,93.31) 92.76,115.2 91.87,116.09 88.9,116.09 ; 88.9,116.09 82.64,116.09 75.02,108.47 v1(75.02,105.28) ; 88.9,116.09 U7.8 ; v1(102.16,93.31) 102.16,62.94 U18.12
N03302_BIBIT1: length 140.8
  TOP w0.254: 88.9,59.82 51.94,59.82 v1(50.8,60.96) ; 88.9,59.82 U21.12 ; 88.9,59.82 106.68,59.82 111.51,64.64 122.17,64.64 123.83,66.29 123.83,68.58 v1(125.1,69.85)
  BOTTOM w0.254: R31.1 v1(50.8,60.96) ; v1(125.1,69.85) 123.83,71.12 123.83,72.03 122.34,73.51 122.34,76.99 122.64,77.3 122.64,77.9 122.34,78.2 122.34,112.86 124.46,114.98 U9.8
N03302_BIBIT2: length 210.5
  TOP w0.254: v1(63.23,76.29) 97.31,76.29 97.49,76.11 98.09,76.11 98.27,76.29 167.26,76.29 179.96,88.99 179.96,119.76 U12.8 ; U23.12 72.9,61.72 72.27,61.72 72.05,61.51 71.46,61.51 70.86,62.1 v1(63.23,62.1) 39.5,62.1 R35.1
  BOTTOM w0.254: v1(63.23,76.29) v1(63.23,62.1)
OP0: length 123.2
  TOP w0.254: 88.9,67.18 104.14,67.18 ; 88.9,67.18 74.8,67.18 U23.14 ; 88.9,67.18 U21.14 ; 104.14,67.18 120.78,67.18 U15.14 ; 104.14,67.18 U18.14 ; v1(103,34.76) 103.76,34.76 109.22,29.3 R3.1
  BOTTOM w0.254: R3.1 106.68,25.4 SW1.6 110.62,16.38 111.76,16.38 119.38,8.76 D19.2 ; v1(103,34.76) 103,58.93 103.63,59.56 104.39,59.56 105.28,60.45 105.28,61.47 104.65,62.1 103.89,62.1 103,62.99 103,64.9 U18.14
OP1: length 119.8
  TOP w0.254: U21.2 81.28,69.72 ; 81.28,69.72 96.52,69.72 ; 81.28,69.72 67.18,69.72 U23.2 ; 96.52,69.72 110.71,69.72 v1(111.85,68.58) U15.2 ; 96.52,69.72 U18.2
  BOTTOM w0.254: v1(111.85,68.58) 111.85,35.56 110.83,34.54 110.74,34.54 R2.1 SW1.7 105.28,19.18 105.28,12.45 110.11,7.62 D18.2
OP2: length 256.7
  TOP w0.254: U19.2 U19.13 112.33,109.22 113.47,108.08 133.48,108.08 U16.2 U16.13 ; U19.5 U19.10 ; v1(59.06,111.12) 58.29,110.36 46.86,110.36 U24.2 ; U8.4 92.27,129.54 90.87,128.14 82.42,128.14 U7.5
  BOTTOM w0.254: 100.93,28.45 100.93,96.6 101.69,97.36 101.69,97.96 101.26,98.39 101.18,98.39 100.93,98.64 100.93,99.73 U19.5 ; 100.93,28.45 101.6,27.77 SW1.8 101.6,15.94 102.74,14.8 102.74,9.02 D17.2 ; 100.93,28.45 100.42,27.94 R1.1 ; v1(59.06,111.12) 61.05,111.12 61.3,111.38 61.3,121.41 62.95,123.06 77.43,123.06 78.57,124.21 78.57,124.29 U7.5 ; U19.13 107.82,108.08 107.82,102.74 U19.10 ; U19.2 97.92,110.36 97.92,128.4 U8.4 ; U16.10 141.1,102.74 141.1,108.08 U16.13
OUT0: length 160.2
  TOP w0.254: 178.44,45 178.94,45.5 178.94,64.01 178.31,64.64 171.58,64.64 U1.1 ; 178.44,45 178.44,12.06 D20.2 ; 178.44,45 v1(97.66,45)
  BOTTOM w0.254: v1(97.66,45) 97.66,54.74 U18.7
OUT1: length 133.5
  TOP w0.254: v1(104.14,43.66) v1(169.04,43.66)
  BOTTOM w0.254: D21.2 169.04,13.84 v1(169.04,43.66) 169.04,62.36 U1.2 ; U18.9 v1(104.14,43.66)
OUT2: length 147.1
  TOP w0.254: 167.13,48.17 167.64,47.66 v1(167.64,46.43) ; 167.13,48.17 133.67,48.17 133.01,48.83 83.95,48.83 79.63,53.15 79.63,54.23 U21.7 ; 167.13,48.17 167.13,51.94 169.67,54.48 170.56,54.48 171.83,55.75 171.83,56.77 U1.4
  BOTTOM w0.254: D22.2 v1(167.64,46.43)
OUT3: length 129.8
  TOP w0.254: U21.9 92.9,49.34 133.62,49.34 134.07,48.89 v1(163.2,48.89) 163.2,50.93 168.15,55.88 U1.5
  BOTTOM w0.254: D23.2 161.16,8.76 161.16,46.86 v1(163.2,48.89)
OUT4: length 139.5
  TOP w0.254: U23.7 67.18,57.02 108.08,57.02 113.16,62.1 127.37,62.1 131.31,66.04 U3.1
  BOTTOM w0.254: D24.2 152.4,14.35 145.29,21.46 144.53,21.46 143.38,22.61 143.38,51.31 142.75,51.94 141.9,51.94 137.33,56.51 137.33,63.33 U3.1
OUT5: length 129.2
  TOP w0.254: v1(132.61,48.11) 78.89,48.11 U23.9
  BOTTOM w0.254: D25.2 143.64,6.48 136.68,6.48 132.61,10.54 v1(132.61,48.11) 132.61,61.49 U3.2
OUT6: length 76.1
  TOP w0.254: U15.7 116.14,55.88 119.82,52.2 137.03,52.2 v1(137.8,51.44) 138.56,52.2 141.1,52.2 U3.9
  BOTTOM w0.254: v1(137.8,51.44) 136.56,51.44 136.31,51.18 136.31,24.21 137.16,23.36 D26.2
OUT7: length 70.2
  TOP w0.254: U3.10 137.99,55.88 136.59,54.48 123.06,54.48 U15.9
  BOTTOM w0.254: D27.2 121.92,15.24 U15.9
OVER: length 237.8
  TOP w0.254: R38.1 29.85,75.56 v1(132.73,75.56) ; v1(133.48,24) 174.12,24 D31.2
  BOTTOM w0.254: U16.6 132.73,97.17 v1(132.73,75.56) 132.73,65.79 133.87,64.64 135.13,64.64 135.76,64.01 135.76,62.99 134.87,62.1 134.11,62.1 133.48,61.47 v1(133.48,24)
SETLSB: length 183.5
  TOP w0.254: U4.8 33.91,120.27 24.51,120.27 R23.1 ; v1(121.29,77.6) 98.55,77.6 v1(97.79,76.83) 97.03,77.6 33.15,77.6 v1(32.39,76.83)
  BOTTOM w0.254: v1(97.79,76.83) 97.79,76.24 97.66,76.11 97.66,67.18 U18.3 ; v1(121.29,77.6) 121.29,76.96 120.74,76.42 120.74,62.14 U15.12 ; v1(32.39,76.83) 34.42,78.87 34.42,108.6 36.7,110.88 36.7,120.78 U4.8
ZERO: length 43.8
  BOTTOM w0.254: U2.2 154.56,61.34 154.56,28.32 D30.2
N00897: length 69.7
  TOP w0.254: U9.5 117.98,128.14 125.92,128.14 127.32,129.54 U10.4 ; U6.8 73.79,119.25 110.47,119.25 v1(112.18,120.96)
  BOTTOM w0.254: U9.5 112.18,122.34 v1(112.18,120.96)
N00909: length 45.2
  TOP w0.254: U11.3 153.8,130.68 164.92,130.68 v1(167.34,128.27) 168.91,128.27 U12.5
  BOTTOM w0.254: v1(167.34,128.27) 167.34,106.98 U13.4
N00921: length 148.3
  TOP w0.254: v1(44.07,118.24) 156.34,118.24 U11.8 ; U4.5 29.08,128.14 38.04,128.14 39.43,129.54 U5.4
  BOTTOM w0.254: U5.4 44.07,127.89 v1(44.07,118.24)
N01659: length 9.8
  BOTTOM w0.254: U3.5 136.82,53.68 136.82,53.59 139.61,50.8 U3.8
N01663: length 11.4
  BOTTOM w0.254: U1.9 176.66,53.34 172.85,57.15 172.85,58.29 U1.3
N01667: length 11.5
  BOTTOM w0.254: U1.12 179.45,59.31 179.45,52.45 U1.8
N01671: length 49.5
  TOP w0.254: U3.6 138.75,53.34 139.89,54.48 155.37,54.48 158.04,57.15 158.04,60.71 159.44,62.1 176.4,62.1 U1.13
N04025: length 84.5
  TOP w0.254: v1(116.09,88.13) v1(150.83,88.13)
  BOTTOM w0.254: U14.3 150.83,105.11 v1(150.83,88.13) ; v1(116.09,88.13) 116.09,87.4 116.17,87.33 116.17,60.29 U15.6
N04155: length 112.5
  TOP w0.254: v1(147.32,60.32) 146.81,59.82 115.44,59.82 U15.5
  BOTTOM w0.254: v1(147.32,60.32) 149.59,62.6 149.59,123.7 149.14,124.16 149.14,124.76 149.59,125.22 149.59,125.86 151.88,128.14 158.62,128.14 U11.11
N04209: length 258.1
  TOP w0.254: v1(115.44,84.81) 23.75,84.81 11.05,97.51 11.05,101.69 14.1,104.74 41.22,104.74 41.76,105.28 46.58,105.28 47.37,106.08 47.37,107.03 46.58,107.82 9.91,107.82 3.94,113.79 3.94,123.32 R21.1 12.7,132.08 U4.3
  BOTTOM w0.254: U15.4 115.44,64.64 v1(115.44,84.81)
N04265: length 68.5
  TOP w0.254: U14.6 150.5,97.15 150.5,97.08 148.72,95.3 v1(127,95.3)
  BOTTOM w0.254: U15.10 125.82,59.78 125.82,94.12 v1(127,95.3)
N04287: length 50.8
  BOTTOM w0.254: U15.11 118.24,62.1 118.24,93.87 118.71,94.34 118.71,103.4 117.98,104.12 117.98,105.54 U17.3
N04351: length 192.7
  TOP w0.254: v1(133.44,118.96) 132.72,118.96 132.5,118.75 71.63,118.75 64.77,125.6 50.1,125.6 48.7,127 U5.5 42.86,127 41.72,125.86 v1(25.4,125.86)
  BOTTOM w0.254: U16.3 135.76,107.82 135.76,116.64 v1(133.44,118.96) ; U4.4 26.8,128.4 26.8,127.25 v1(25.4,125.86) 26.8,124.46 26.8,123.95 27.69,123.06 28.45,123.06 29.08,122.43 29.08,67.18 R37.1
N04563: length 230
  TOP w0.254: U4.12 35.56,133.22 ; 35.56,133.22 51.94,133.22 U5.13 ; 35.56,133.22 v1(16.6,133.22) ; v1(139.92,116.97) v1(58.29,116.97)
  BOTTOM w0.254: R39.1 16.6,69.94 v1(16.6,133.22) ; U5.13 58.29,129.67 v1(58.29,116.97) ; v1(139.92,116.97) 139.92,98.84 U16.8
N013601: length 8.7
  TOP w0.254: U1.10 175.64,55.88 173.1,53.34 U1.6
N014012: length 40.6
  BOTTOM w0.254: U1.11 171.58,64.64 169.67,64.64 164.72,59.69 164.72,58.93 160.53,54.74 157.99,54.74 155.58,57.15 155.58,62.86 U2.1
N014420: length 2.5
  BOTTOM w0.254: U3.4 U3.3
